# EAGLE board TripleClockGenerator (EAGLE 9.0.0)
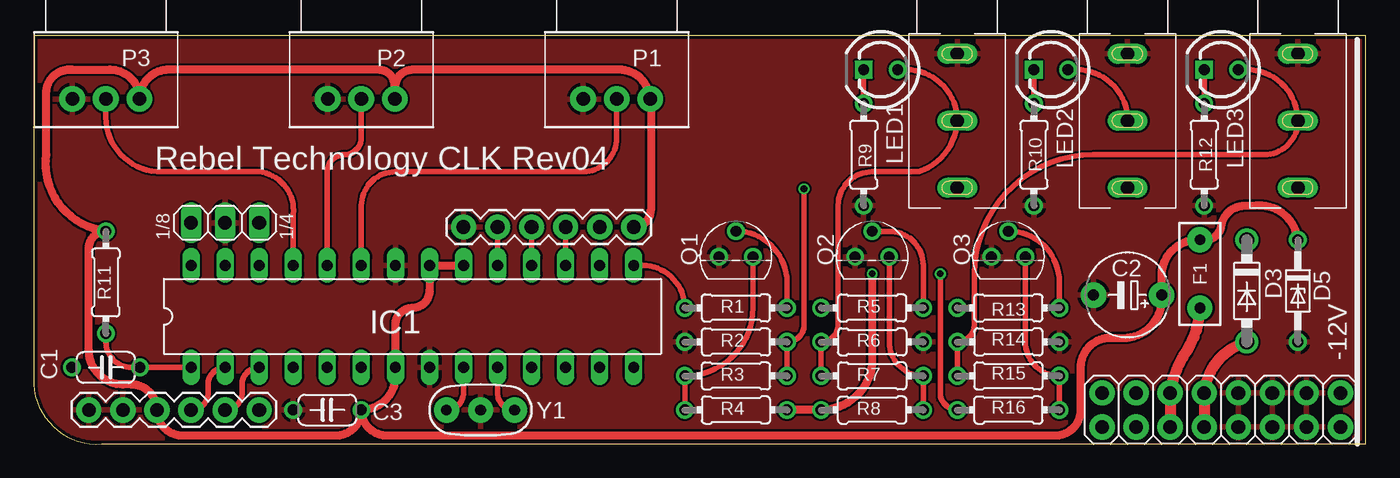
[diagram p0: board, top side]
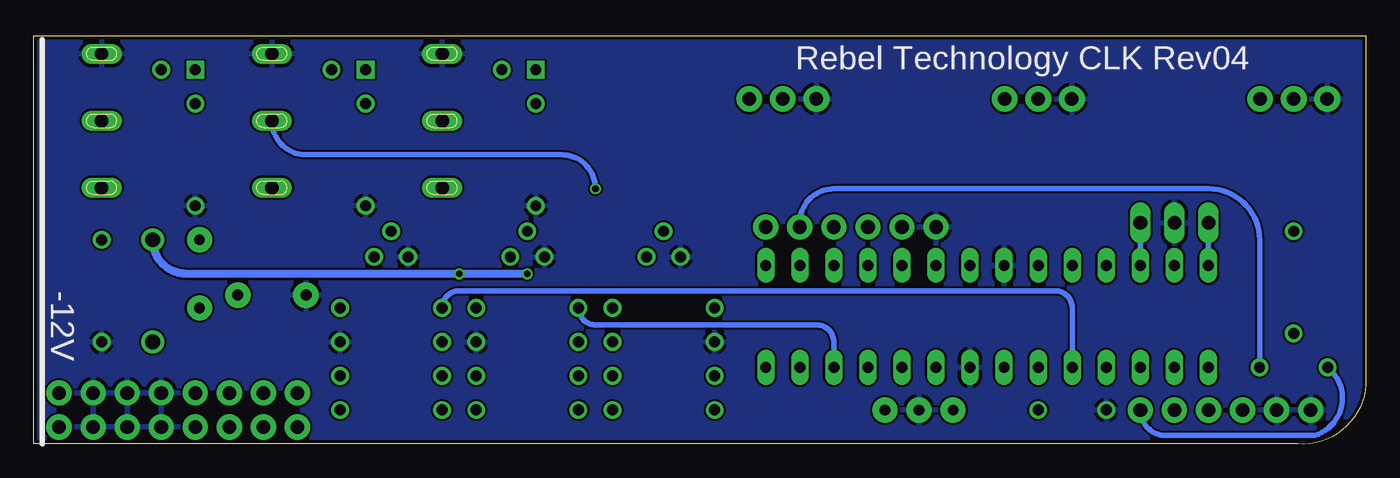
[diagram p1: board, bottom side, seen from below]

Size 99.38 x 30.49 mm. Coordinates in mm from the lower left corner, seen from the top.
Outline: 99.38,30.49 0.01,30.49 0,4.45 arc90 5.08,0.01 99.38,0.01 99.38,30.49
Copper layers (1*16): Top 0.035mm / dielectric 1.5mm / Bottom 0.035mm
Design rules "SeeedStudio_2layer_DRU_no_angle_20140221": minimum track width 6mil, minimum drill 12mil, track to track 6mil, track to pad 6mil, pad to pad 6mil, via to via 6mil, smd to smd 0mil, copper to edge 10mil, drill to drill 10mil, minimum pad ring 10mil, minimum via ring 6mil, stop-mask expansion 2mil, vias tented up to drill 100mil, thermal gap 10mil

## Footprints (pad centres in the part's own frame; a part is rotated, then mirrored left to right if it is on the bottom)
C050-024X044 = drill 0.813: 1 -2.54,0; 2 2.54,0
E5-6 = drill 0.813 pad 1.905: + -2.54,0; - 2.54,0
DO41-7.6 = drill 1.1 pad 1.7: A 3.81,0; C -3.81,0
DO34Z7 = drill 0.813: A 3.81,0; C -3.81,0
PTC = drill 0.8 pad 1.88: P$1 -2.54,0; P$2 2.54,0
DIL28-3 = drill 0.813 long: 1 -16.51,-3.81; 2 -13.97,-3.81; 3 -11.43,-3.81; 4 -8.89,-3.81; 5 -6.35,-3.81; 6 -3.81,-3.81; 7 -1.27,-3.81; 8 1.27,-3.81; 9 3.81,-3.81; 10 6.35,-3.81; 11 8.89,-3.81; 12 11.43,-3.81; 13 13.97,-3.81; 14 16.51,-3.81; 15 16.51,3.81; 16 13.97,3.81; 17 11.43,3.81; 18 8.89,3.81; 19 6.35,3.81; 20 3.81,3.81; 21 1.27,3.81; 22 -1.27,3.81; 23 -3.81,3.81; 24 -6.35,3.81; 25 -8.89,3.81; 26 -11.43,3.81; 27 -13.97,3.81; 28 -16.51,3.81
1X06 = drill 1.016 pad 1.88: 1 0,0; 2 2.54,0; 3 5.08,0; 4 7.62,0; 5 10.16,0; 6 12.7,0
1X03 = drill 1.016 long: 1 -2.54,0; 2 0,0; 3 2.54,0
LED3MM = drill 0.813: A -1.27,0 | drill 0.813 square: K 1.27,0
UJ-3502-R-SLOT = drill 1 long: P$1 0,0; P$2 0,5; P$3 0,-5
POT-BOURNS-PTD901 = drill 1 pad 1.93: 1 -2.5,-0.036; 2 0,-0.036; 3 2.5,-0.036
TO92 = drill 0.813: 1 1.27,0; 2 0,1.905; 3 -1.27,0
0204/7 = drill 0.813: 1 -3.81,0; 2 3.81,0
2X8 = drill 1.016 pad 1.88: 1 0,0; 2 0,2.54; 3 2.54,0; 4 2.54,2.54; 5 5.08,0; 6 5.08,2.54; 7 7.62,0; 8 7.62,2.54; 9 10.16,0; 10 10.16,2.54; 11 12.7,0; 12 12.7,2.54; 13 15.24,0; 14 15.24,2.54; 15 17.78,0; 16 17.78,2.54
RESONATOR-PTH = drill 0.8 pad 1.88: 1 -2.54,0; 2 0,0; 3 2.54,0

## Placement (x,y rotation side)
C1  100n  [C050-024X044]  5.4,5.72 0 top
C2  10u  [E5-6]  81.6,11.12 180 top
C3  100n  [C050-024X044]  21.91,2.55 180 top
D3  1N5817  [DO41-7.6]  90.49,11.44 270 top
D5  BZV85-C5V6  [DO34Z7]  94.3,11.44 270 top
F1  PTCPTH  [PTC]  87,12.71 90 top
IC1  MEGA168  [DIL28-3]  28.26,9.53 0 top
JP1  [1X06]  4.13,2.55 0 top
JP2  [1X03]  14.29,16.52 180 top
JP3  [1X06]  32.07,16.2 0 top
LED1  [LED3MM]  63.18,27.95 180 top
LED2  [LED3MM]  75.88,27.95 180 top
LED3  [LED3MM]  88.58,27.95 180 top
OUTA  JACK-UJ-3502-RSLOT  [UJ-3502-R-SLOT]  68.9,24.14 180 top
OUTB  JACK-UJ-3502-RSLOT  [UJ-3502-R-SLOT]  81.6,24.14 180 top
OUTC  JACK-UJ-3502-RSLOT  [UJ-3502-R-SLOT]  94.3,24.14 180 top
P1  [POT-BOURNS-PTD901]  43.5,25.73 180 top
P2  [POT-BOURNS-PTD901]  24.45,25.73 180 top
P3  [POT-BOURNS-PTD901]  5.4,25.73 180 top
Q1  2N3904  [TO92]  52.39,13.98 0 top
Q2  2N3904  [TO92]  62.55,13.98 0 top
Q3  2N3904  [TO92]  72.71,13.98 0 top
R1  1K  [0204/7]  52.39,10.17 0 top
R2  1K  [0204/7]  52.39,7.63 0 top
R3  100R  [0204/7]  52.39,5.09 0 top
R4  1K  [0204/7]  52.39,2.55 180 top
R5  1K  [0204/7]  62.55,10.17 0 top
R6  1K  [0204/7]  62.55,7.63 180 top
R7  100R  [0204/7]  62.55,5.09 180 top
R8  1K  [0204/7]  62.55,2.55 0 top
R9  1K  [0204/7]  61.91,21.6 270 top
R10  1K  [0204/7]  74.61,21.6 270 top
R11  10K  [0204/7]  5.4,12.07 90 top
R12  1K  [0204/7]  87.31,21.6 270 top
R13  1K  [0204/7]  72.71,10.17 0 top
R14  1K  [0204/7]  72.71,7.63 180 top
R15  100R  [0204/7]  72.71,5.09 180 top
R16  1K  [0204/7]  72.71,2.55 0 top
U$1  M08X2  [2X8]  97.47,3.82 180 top
Y1  16Mhz  [RESONATOR-PTH]  33.34,2.55 0 top

## Library data of the parts
C1-C3 R1-R16 = rcl
D3 D5 = diode
F1 LED1-LED3 OUTA OUTB OUTC P1-P3 = Rebel
IC1 = atmel; OC_FARNELL: unknown; OC_NEWARK: unknown
JP1 JP3 U$1 Y1 = SparkFun
JP2 = pinhead
Q1-Q3 = transistor-npn

## Nets
+5V: C2.+ C3.1 D5.C F1.P$2 IC1.7 IC1.20 IC1.21 JP1.3 JP3.6 P1.1 P2.1 P3.1 R11.2
+12V: D3.C R4.1 R8.1 R16.1
ADC0: IC1.23 P1.2
ADC1: IC1.24 P2.2
ADC2: IC1.25 P3.2
GND: C2.- C3.2 D5.A IC1.8 IC1.22 JP1.1 JP1.2 JP2.2 JP3.1 OUTA.P$3 OUTB.P$3 OUTC.P$3 P1.3 P2.3 P3.3 Q1.3 Q2.3 Q3.3 R2.1 R6.1 R9.2 R10.2 R12.2 R14.1 U$1.3 U$1.4 U$1.5 U$1.6 U$1.7 U$1.8 Y1.2
MISO: IC1.18 JP3.3
MOSI: IC1.17 JP3.4
N$3: LED3.K R12.1
N$5: IC1.11
N$6: IC1.16
N$7: IC1.9 Y1.1
N$8: IC1.10 Y1.3
N$10: IC1.4
N$11: IC1.28 JP2.3
N$12: IC1.27
N$13: LED2.A OUTB.P$1 R2.2 R3.2
N$14: Q1.1 R3.1 R4.2
N$15: IC1.26 JP2.1
N$17: IC1.13
N$19: IC1.14
N$21: Q1.2 R1.2
N$22: Q3.2 R13.2
N$23: LED3.A OUTC.P$1 R14.2 R15.2
N$24: Q3.1 R15.1 R16.2
N$25: Q2.2 R5.2
N$26: LED1.A OUTA.P$1 R6.2 R7.2
N$27: Q2.1 R7.1 R8.2
N$28: LED1.K R9.1
N$29: C1.1 JP1.6
N$30: LED2.K R10.1
N$44: F1.P$1 U$1.11 U$1.12
N$45: D3.A U$1.9 U$1.10
OUTA: IC1.12 R5.1
OUTB: IC1.15 R1.1
OUTC: IC1.5 R13.1
RST: C1.2 IC1.1 JP3.5 R11.1
RX: IC1.2 JP1.4
SCK: IC1.19 JP3.2
TX: IC1.3 JP1.5

## Tracks (layer width: path | path; a pad name or v marks a point on that pad's centre or on a via)
+5V
  Top 0.61: IC1.20 IC1.21 29.53,11.44 arc-90 28.26,10.17 arc90 26.99,8.9 IC1.7 26.99,5.09 arc-90 C3.1 | P2.1 26.95,26.64 | 26.95,26.64 26.99,26.68 arc-90 28.26,27.95 43.49,27.95 arc-90 P1.1 arc-90 46.04,25.72 46.04,17.47 arc-90 JP3.6 | C3.1 arc90 26.35,0.64 76.2,0.64 arc90 78.11,2.55 78.11,5.72 arc-90 80.33,7.95 81.6,7.95 arc90 C2.+ 84.14,12.71 arc-90 F1.P$2 arc90 88.58,16.2 arc-90 90.49,17.79 91.12,17.79 arc-90 D5.C | C3.1 arc-90 22.54,0.64 11.11,0.64 arc-90 JP1.3 arc90 7.3,4.45 6.67,4.45 arc-90 4.13,6.99 4.13,14.61 arc-90 R11.2 arc-90 0.95,21.6 0.95,26.36 arc-90 2.86,27.95 5.71,27.95 arc-90 P3.1 arc-90 10.08,27.95 25.72,27.95 arc-90 26.95,26.72 26.95,26.64
+12V  (via drill 0.5)
  Top 0.406: R16.1 arc-90 67.63,3.82 v67.63,12.71
  Top 0.61: R4.1 R8.1 arc90 62.55,6.36 v62.55,12.71
  Bottom 0.61: v62.55,12.71 v67.63,12.71 87.95,12.71 arc90 D3.C
ADC0
  Top 0.406: P1.2 43.5,22.87 arc-90 40.96,20.33 26.99,20.33 arc90 24.45,17.79 IC1.23
ADC1
  Top 0.406: P2.2 24.45,22.87 arc-90 23.18,21.6 arc90 21.91,20.33 IC1.24
ADC2
  Top 0.406: P3.2 5.4,24.77 arc90 9.21,20.33 16.83,20.33 arc-90 19.37,17.15 IC1.25
GND
  pour Bottom: 101.92,0.01 -0.95,0.01 -0.95,35.57 101.92,35.57
  pour Top: 101.92,-1.26 -2.22,-1.26 -2.22,35.57 101.92,35.57
MISO
  Top 0.406: IC1.18 JP3.3
MOSI
  Top 0.406: IC1.17 JP3.4
N$3
  Top 0.406: R12.1 LED3.K
N$7
  Top 0.406: IC1.9 32.07,3.82 arc-90 Y1.1
N$8
  Top 0.406: IC1.10 34.61,3.82 arc90 Y1.3
N$11
  Bottom 0.406: IC1.28 JP2.3
N$13  (via drill 0.5)
  Top 0.406: R3.2 R2.2 arc90 57.47,8.9 v57.47,19.06 | OUTB.P$1 arc90 77.79,27.95 LED2.A
  Bottom 0.406: v57.47,19.06 arc-90 60.01,21.6 79.06,21.6 arc90 OUTB.P$1
N$14
  Top 0.406: R4.2 R3.1 arc90 53.66,10.17 Q1.1
N$15
  Bottom 0.406: IC1.26 JP2.1
N$21
  Top 0.406: R1.2 56.2,12.07 arc90 Q1.2
N$22
  Top 0.406: Q3.2 arc-90 76.52,12.07 R13.2
N$23
  Top 0.406: R15.2 R14.2 arc90 70.17,8.9 70.17,12.71 arc-90 79.06,21.6 91.76,21.6 arc90 OUTC.P$1 arc90 90.49,27.95 LED3.A
N$24
  Top 0.406: R16.2 R15.1 arc-90 73.98,7.63 Q3.1
N$25
  Top 0.406: R5.2 66.36,13.34 arc90 63.82,15.88 Q2.2
N$26
  Top 0.406: R7.2 R6.2 arc90 60.01,8.9 60.01,17.79 arc-90 62.55,20.33 66.04,20.33 arc68 OUTA.P$1 arc90 65.09,27.95 LED1.A
N$27
  Top 0.406: R8.2 R7.1 arc-90 63.82,7.63 Q2.1
N$28
  Top 0.406: R9.1 LED1.K
N$29
  Bottom 0.406: JP1.6 arc-90 14.92,0.64 3.81,0.64 arc-124 C1.1
N$30
  Top 0.406: R10.1 LED2.K
N$44
  Top 0.813: F1.P$1 arc-30 86.04,6.99 arc25 U$1.11 U$1.12
N$45
  Top 0.813: D3.A arc67 U$1.9 U$1.10
OUTA
  Bottom 0.406: R5.1 arc-90 57.47,8.9 40.96,8.9 arc90 39.69,7.63 IC1.12
OUTB
  Top 0.406: R1.1 arc90 45.4,13.34 IC1.15
OUTC
  Bottom 0.406: IC1.5 21.91,10.17 arc-90 23.18,11.44 67.63,11.44 arc-90 R13.1
RST
  Top 0.406: IC1.1 C1.2 7.3,5.72 arc-90 5.4,7.63 R11.1
  Bottom 0.406: JP3.5 42.23,16.52 arc90 39.69,19.06 11.75,19.06 arc90 7.94,15.25 C1.2
RX
  Top 0.406: IC1.2 arc90 13.02,4.45 13.02,3.82 arc-90 JP1.4
SCK
  Top 0.406: IC1.19 JP3.2
TX
  Top 0.406: JP1.5 arc90 15.56,3.82 15.56,4.45 arc-90 IC1.3

## Text on the board
tPlace: Rebel Technology CLK Rev04 | 1/8 | 1/4 | -12V
bPlace: Rebel Technology CLK Rev04 | -12V
tNames: Y1